# Altium PCB V3s.PcbDoc
Units mm, origin at the board's own origin, x right, y up, seen from the top; angles counter-clockwise.
Board outline 45.34 x 56.39 mm, 2 copper layers (Top Layer, Bottom Layer), stack 0.533 mm thick; 110 components, 51 nets, 431 pads, 303 vias.
Unrouted connection lines stored in the file: 396.
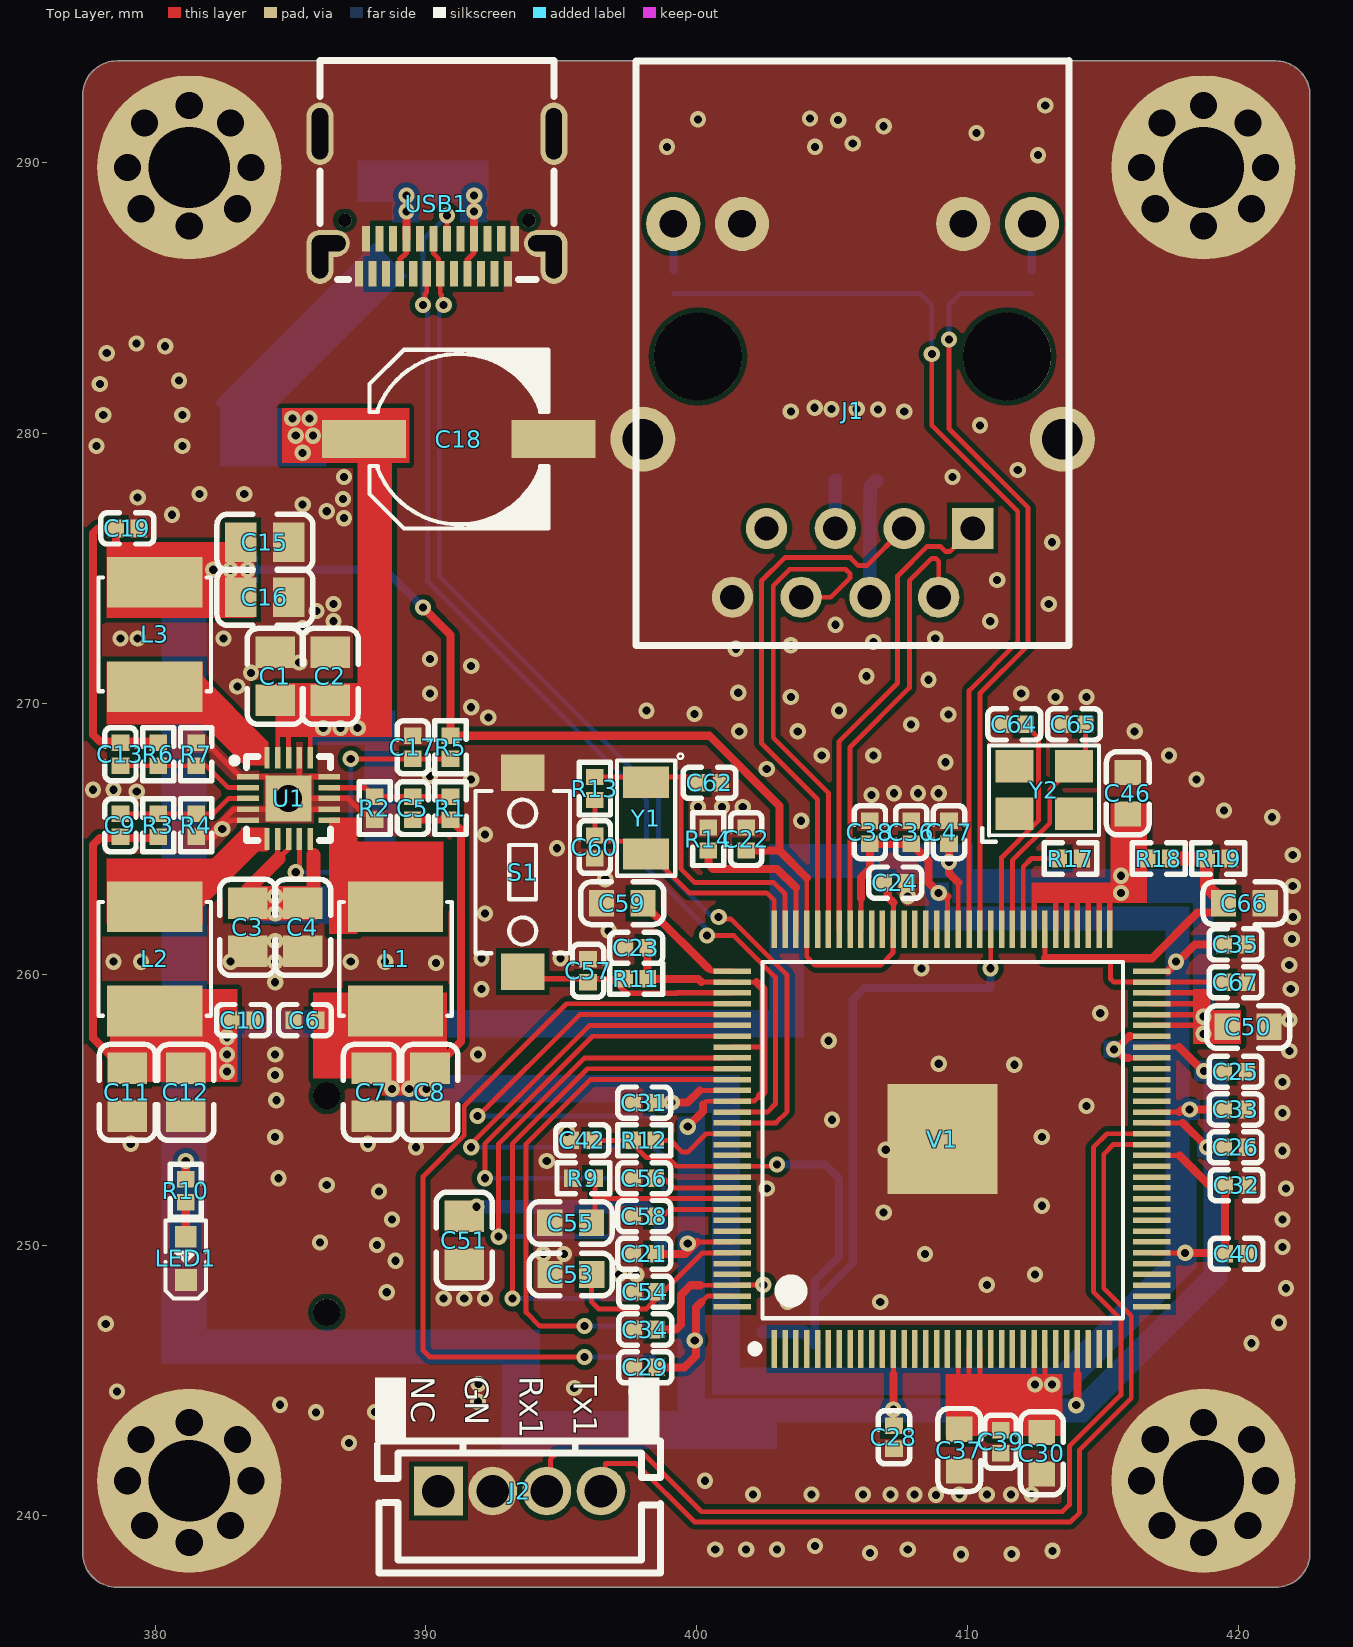
[diagram p0: Top Layer view]
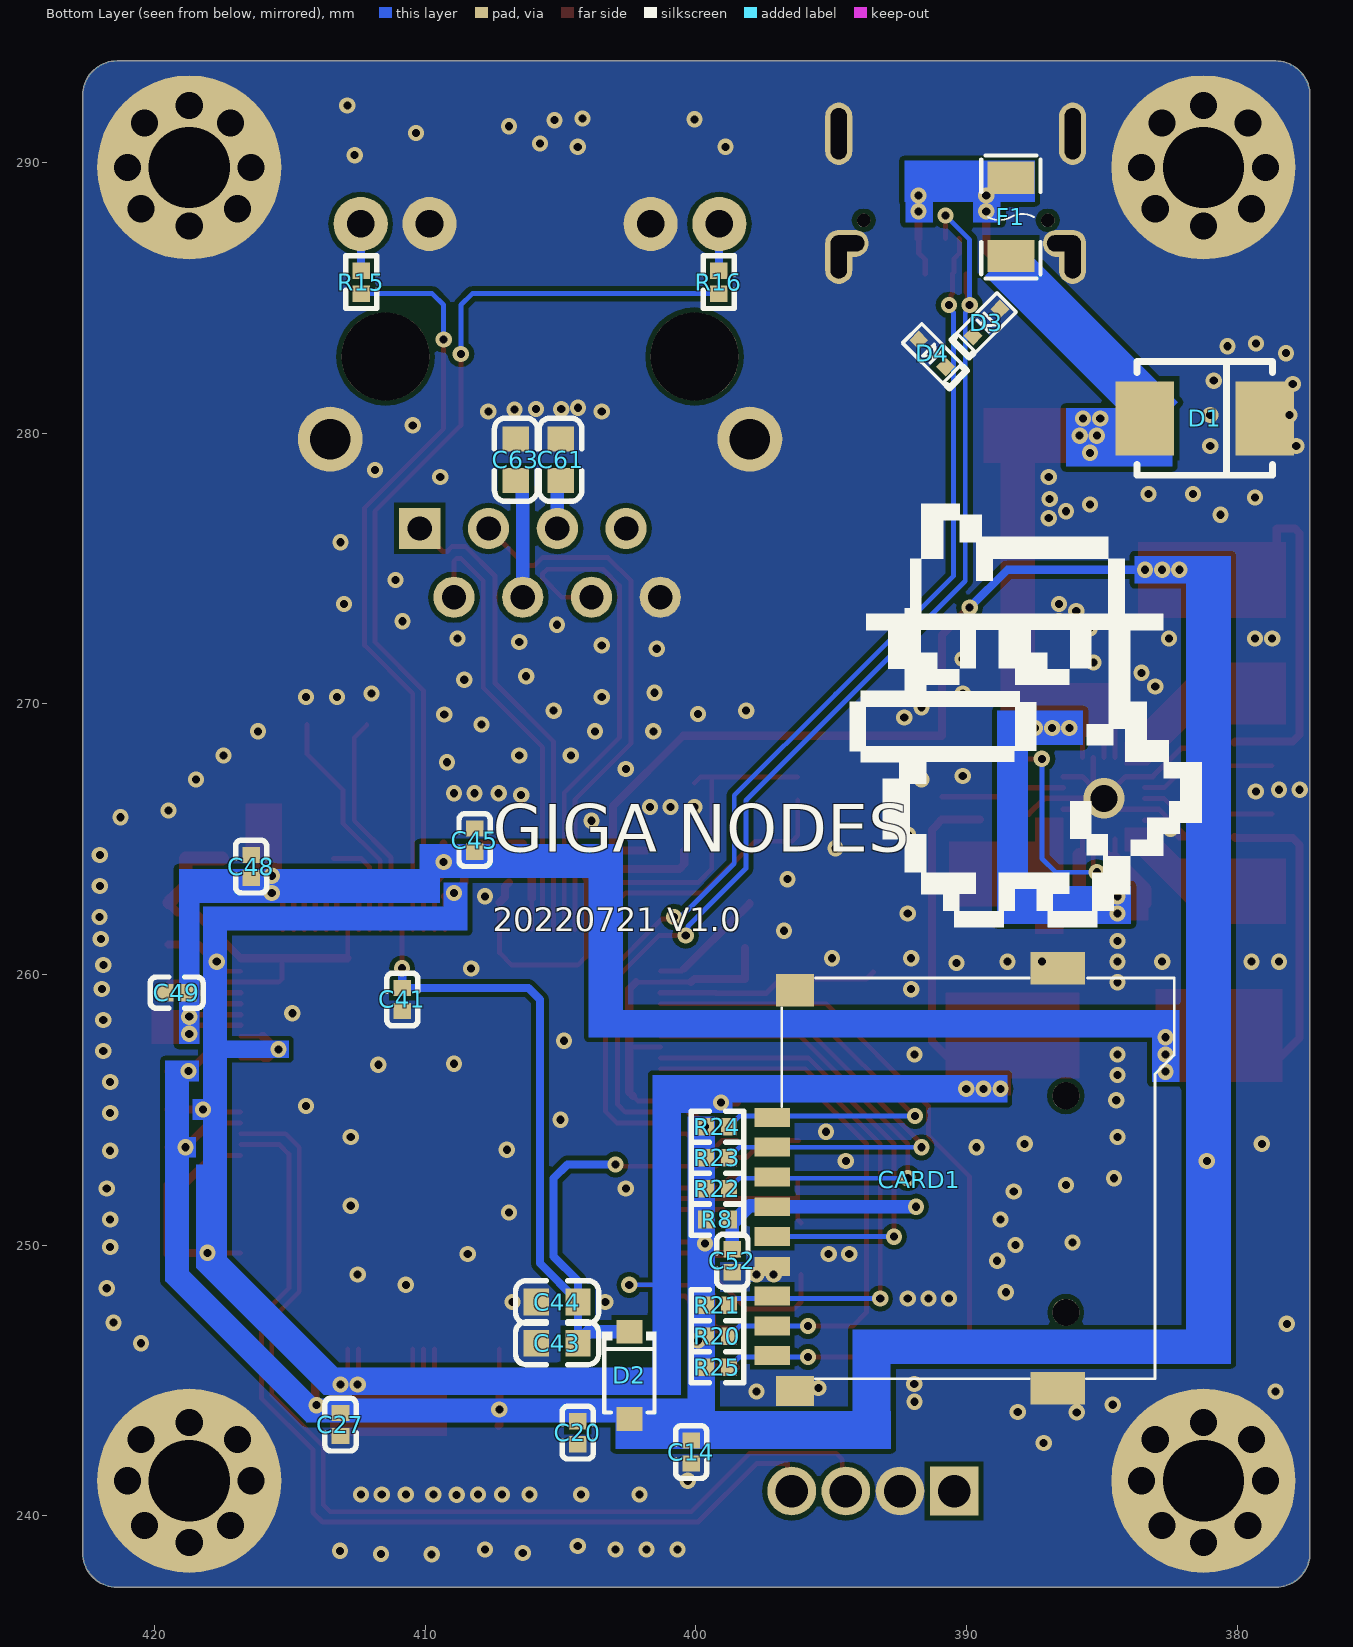
[diagram p1: Bottom Layer view, seen from below]
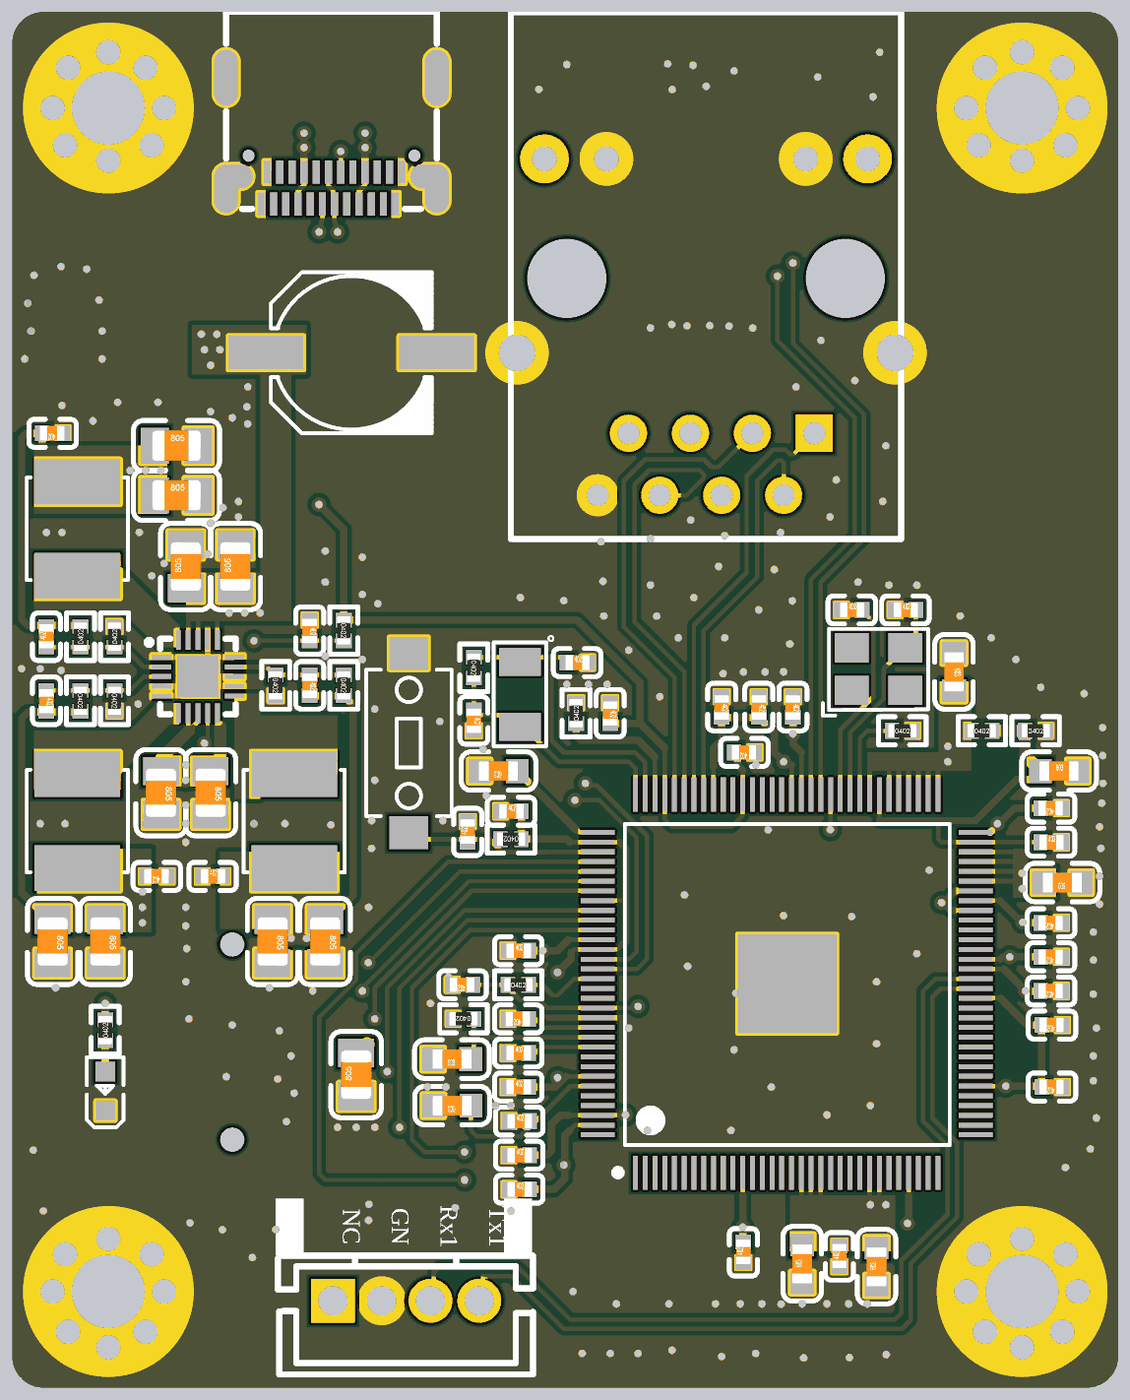
[diagram p2: 3D render of the assembled board from above, using the file's embedded part models]
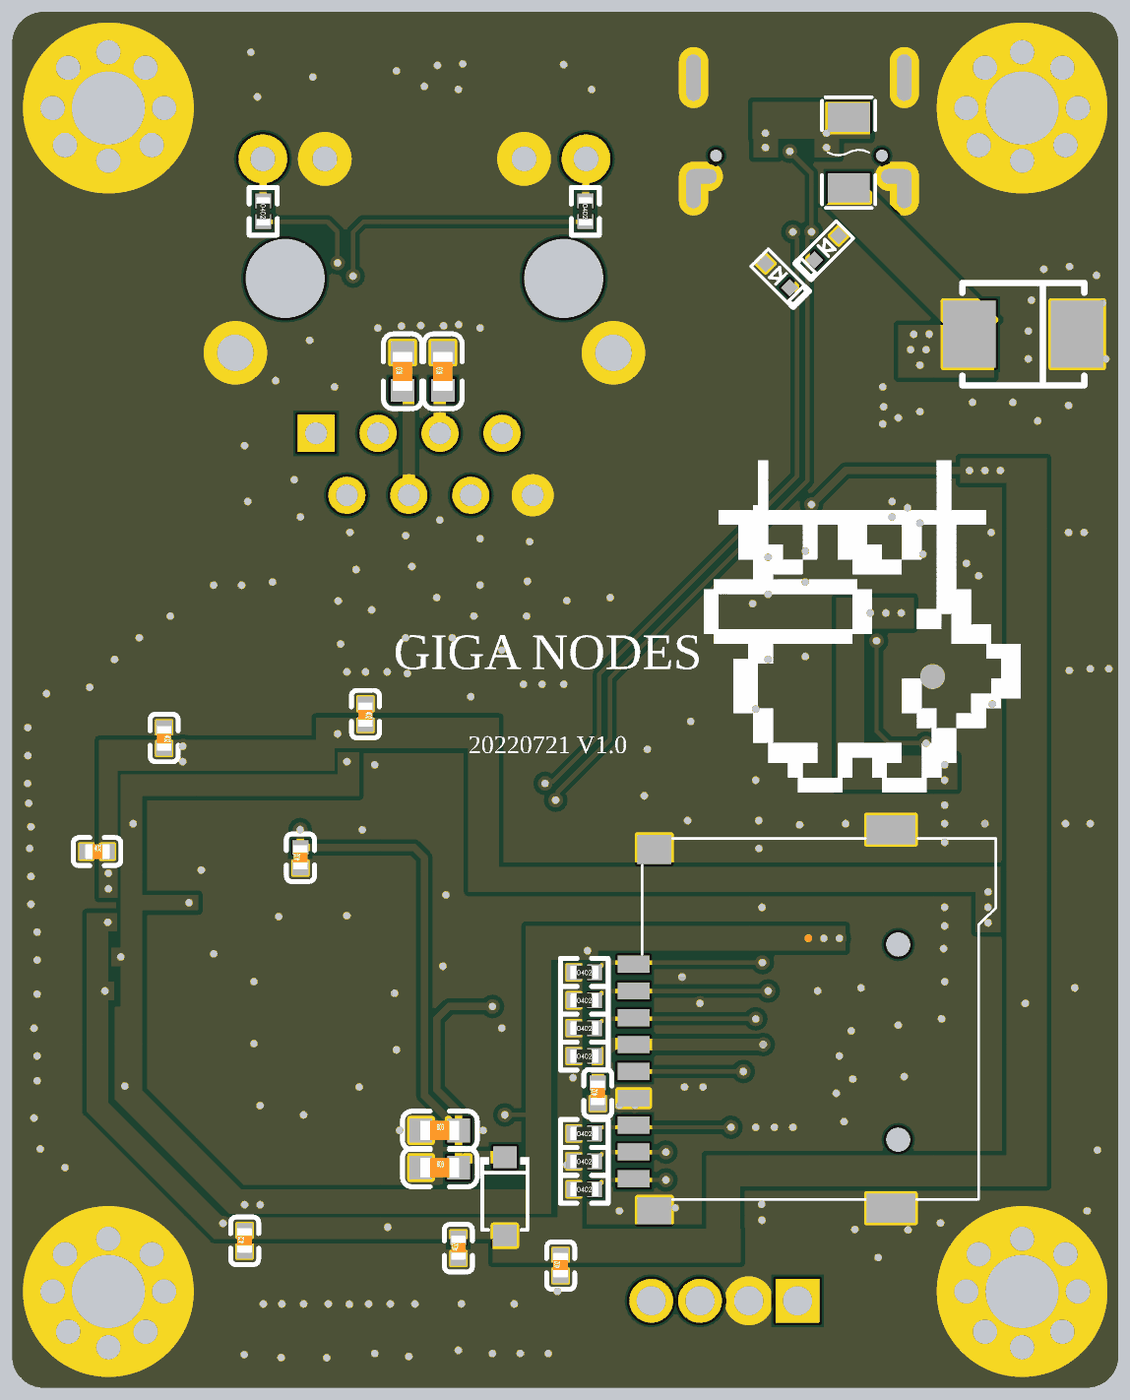
[diagram p3: 3D render of the assembled board from below, using the file's embedded part models]

## Layer stack, top to bottom
Top Solder: solder mask 0.0102, Solder Resist, Dk 3.5
Top Layer: signal copper 0.0356
Dielectric 2: prepreg 0.0711, PP-006, Dk 4.1
Dielectric 1: dielectric 0.32, FR-4, Dk 4.8
Dielectric 3: prepreg 0.0711, PP-006, Dk 4.1
Bottom Layer: signal copper 0.0356
Bottom Solder: solder mask 0.0102, Solder Resist, Dk 3.5

## Board outline
377.317,238.633 ccw(c378.587,238.633) 378.587,237.363 421.386,237.363 ccw(c421.386,238.633) 422.656,238.633 422.656,292.481 ccw(c421.386,292.481) 421.386,293.751 378.587,293.751 ccw(c378.587,292.481) 377.317,292.481

## Design rules (kind name [scope] priority, off if disabled: settings)
Clearance [All] p1: gap=0.1 ignorepadtopadclearanceinfootprint=TRUE
DiffPairsRouting [All] p1: maxlimit=0.254 minlimit=0.15 mostfreqgap=0.254 toplayer_minwidth=0.18 toplayer_maxwidth=0.381 toplayer_prefwidth=0.18 bottomlayer_minwidth=0.18 bottomlayer_maxwidth=0.381 bottomlayer_prefwidth=0.18 maxuncoupledlength=12.7
HoleSize [All] p1 off: absolutevalues=TRUE maxlimit=2.54 minlimit=0.025 maxpercent=80.000 minpercent=20.000
HoleToHoleClearance [All] p1 off: gap=0.254 allowstackedmicrovias=TRUE
LayerPairs [All] p1 off: enforce=TRUE
MinimumSolderMaskSliver [All] p1 off: minsoldermaskwidth=0.254
NetAntennae [All] p1 off: netantennaetolerance=0
PolygonConnect [All] p1: connectstyle=Direct reliefconductorwidth=0.5 reliefentries=4 polygonreliefangle="90 Angle" airgapwidth=0.5
RoutingVias [All] p1: holewidth=0.711 width=1.27 viastyle="Through Hole" minholewidth=0.3 minwidth=0.6 maxholewidth=3 maxwidth=3
SilkToSilkClearance [All] p1 off: silktosilkclearance=0.254
SilkToSolderMaskClearance [IsPad] p1 off: minsilkscreentomaskgap=0.254 clearancetoexposedcopper=TRUE
SolderMaskExpansion [All] p1: expansion=0.102 istentingtop=FALSE
Width [All] p1: maxlimit=2 minlimit=0.18 preferedwidth=0.254
22 further rules are at their usual default settings.

## Classes and differential pairs
component class V3s: C51 C52 C53 C54 C55 C56 C57 C58 C59 C60 C61 C62 C63 C64 C65 C66 C67 CARD1 D3 D4 J1 J2 R8 R9 R11 R12 R13 R14 R15 R16 R17 R18 R19 R20 R21 R22 R23 R24 R25 S1 USB1 V1 Y1 Y2
component class POWER: C1 C2 C3 C4 C5 C6 C7 C8 C9 C10 C11 C12 C13 C14 C15 C16 C17 C18 C19 C20 C21 C22 C23 C24 C25 C26 C27 C28 C29 C30 C31 C32 C33 C34 C35 C36 C37 C38 C39 C40 C41 C42 C43 C44 C45 C46 C47 C48 C49 C50 D1 D2 F1 L1 L2 L3 LED1 R1 R2 R3 R4 R5 R6 R7 R10 U1
differential pair USB-D: +USB-D_P -USB-D_N
differential pair PHY-TX: +PHY-TX_P -PHY-TX_N
differential pair PHY-RX: +PHY-RX_P -PHY-RX_N

## Components (designator, comment, footprint, x,y, rotation, side; value= is the part's Value field where it differs from the comment)
C1 "22uF" 0805_C 384.429,270.127 r90 top value="贴片电容/105 ±10% 50V X7R 编带 封装规格：0603"
C2 "22uF" 0805_C 386.461,270.127 r90 top value="贴片电容/105 ±10% 50V X7R 编带 封装规格：0603"
C3 "22uF" 0805_C 383.413,262.636 r270 top value="贴片电容/105 ±10% 50V X7R 编带 封装规格：0603"
C4 "22uF" 0805_C 385.445,262.636 r270 top value="贴片电容/105 ±10% 50V X7R 编带 封装规格：0603"
C5 "22pF" 0402_C 389.509,266.148 r270 top value="贴片电容/105 ±10% 50V X7R 编带 封装规格：0603"
C6 "0.1uF" 0402_C 385.528,258.318 r0 top value="贴片电容/105 ±10% 50V X7R 编带 封装规格：0603"
C7 "22uF" 0805_C 387.985,256.54 r270 top value="贴片电容/105 ±10% 50V X7R 编带 封装规格：0603"
C8 "22uF" 0805_C 390.144,256.54 r270 top value="贴片电容/105 ±10% 50V X7R 编带 封装规格：0603"
C9 "22pF" 0402_C 378.714,265.513 r270 top value="贴片电容/105 ±10% 50V X7R 编带 封装规格：0603"
C10 "0.1uF" 0402_C 383.242,258.318 r180 top value="贴片电容/105 ±10% 50V X7R 编带 封装规格：0603"
C11 "22uF" 0805_C 378.968,256.54 r270 top value="贴片电容/105 ±10% 50V X7R 编带 封装规格：0603"
C12 "22uF" 0805_C 381.127,256.54 r270 top value="贴片电容/105 ±10% 50V X7R 编带 封装规格：0603"
C13 "22pF" 0402_C 378.714,268.141 r90 top value="贴片电容/105 ±10% 50V X7R 编带 封装规格：0603"
C14 "0.1uF" 0402_C 400.177,242.36 r90 bottom value="贴片电容/105 ±10% 50V X7R 编带 封装规格：0603"
C15 "22uF" 0805_C 383.157,275.971 r0 top value="贴片电容/105 ±10% 50V X7R 编带 封装规格：0603"
C16 "22uF" 0805_C 383.157,273.939 r0 top value="贴片电容/105 ±10% 50V X7R 编带 封装规格：0603"
C17 "0.1uF" 0402_C 389.509,268.395 r270 top value="贴片电容/105 ±10% 50V X7R 编带 封装规格：0603"
C18 "470uF" SEC6.3 387.716,279.781 r0 top value="贴片电解电容/220uF 16V ±20% 编带  封装规格：6.3*7.7"
C19 "0.1uF" 0402_C 378.968,276.479 r180 top value="贴片电容/105 ±10% 50V X7R 编带 封装规格：0603"
C20 "0.1uF" 0402_C 404.368,243.078 r90 bottom value="贴片电容/105 ±10% 50V X7R 编带 封装规格：0603"
C21 "0.1uF" 0402_C 398.062,249.682 r0 top value="贴片电容/105 ±10% 50V X7R 编带 封装规格：0603"
C22 "0.1uF" 0402_C 401.828,265.005 r270 top value="贴片电容/105 ±10% 50V X7R 编带 封装规格：0603"
C23 "0.1uF" 0402_C 397.764,260.985 r0 top value="贴片电容/105 ±10% 50V X7R 编带 封装规格：0603"
C24 "0.1uF" 0402_C 407.333,263.398 r180 top value="贴片电容/105 ±10% 50V X7R 编带 封装规格：0603"
C25 "0.1uF" 0402_C 419.906,256.413 r180 top value="贴片电容/105 ±10% 50V X7R 编带 封装规格：0603"
C26 "0.1uF" 0402_C 419.906,253.619 r180 top value="贴片电容/105 ±10% 50V X7R 编带 封装规格：0603"
C27 "0.1uF" 0402_C 413.131,243.376 r90 bottom value="贴片电容/105 ±10% 50V X7R 编带 封装规格：0603"
C28 "0.1uF" 0402_C 407.289,242.907 r90 top value="贴片电容/105 ±10% 50V X7R 编带 封装规格：0603"
C29 "0.1uF" 0402_C 398.101,245.491 r0 top value="贴片电容/105 ±10% 50V X7R 编带 封装规格：0603"
C30 "10uF" 0603_C 412.75,242.316 r90 top value="贴片电容/105 ±10% 50V X7R 编带 封装规格：0603"
C31 "0.1uF" 0402_C 398.062,255.27 r0 top value="贴片电容/105 ±10% 50V X7R 编带 封装规格：0603"
C32 "0.1uF" 0402_C 419.945,252.222 r180 top value="贴片电容/105 ±10% 50V X7R 编带 封装规格：0603"
C33 "0.1uF" 0402_C 419.906,255.016 r180 top value="贴片电容/105 ±10% 50V X7R 编带 封装规格：0603"
C34 "0.1uF" 0402_C 398.101,246.888 r0 top value="贴片电容/105 ±10% 50V X7R 编带 封装规格：0603"
C35 "0.1uF" 0402_C 419.906,261.112 r180 top value="贴片电容/105 ±10% 50V X7R 编带 封装规格：0603"
C36 "0.1uF" 0402_C 407.924,265.259 r270 top value="贴片电容/105 ±10% 50V X7R 编带 封装规格：0603"
C37 "10uF" 0603_C 409.702,242.435 r90 top value="贴片电容/105 ±10% 50V X7R 编带 封装规格：0603"
C38 "0.1uF" 0402_C 406.4,265.259 r270 top value="贴片电容/105 ±10% 50V X7R 编带 封装规格：0603"
C39 "0.1uF" 0402_C 411.226,242.741 r90 top value="贴片电容/105 ±10% 50V X7R 编带 封装规格：0603"
C40 "0.1uF" 0402_C 419.945,249.682 r180 top value="贴片电容/105 ±10% 50V X7R 编带 封装规格：0603"
C41 "0.1uF" 0402_C 410.845,259.08 r90 bottom value="贴片电容/105 ±10% 50V X7R 编带 封装规格：0603"
C42 "0.1uF" 0402_C 395.776,253.873 r180 top
C43 "10uF" 0603_C 405.13,246.38 r180 bottom
C44 "10uF" 0603_C 405.13,247.904 r180 bottom
C45 "0.1uF" 0402_C 408.178,264.966 r270 bottom value="贴片电容/105 ±10% 50V X7R 编带 封装规格：0603"
C46 "10uF" 0603_C 415.925,266.7 r270 top value="贴片电容/105 ±10% 50V X7R 编带 封装规格：0603"
C47 "0.1uF" 0402_C 409.321,265.259 r270 top value="贴片电容/105 ±10% 50V X7R 编带 封装规格：0603"
C48 "0.1uF" 0402_C 416.433,263.989 r270 bottom value="贴片电容/105 ±10% 50V X7R 编带 封装规格：0603"
C49 "0.1uF" 0402_C 419.183,259.334 r180 bottom value="贴片电容/105 ±10% 50V X7R 编带 封装规格：0603"
C50 "10uF" 0603_C 420.37,258.064 r180 top value="贴片电容/105 ±10% 50V X7R 编带 封装规格：0603"
C51 "22uF" 0805_C 391.414,249.299 r90 top value="贴片电容/105 ±10% 50V X7R 编带 封装规格：0603"
C52 "0.1uF" 0402_C 398.653,249.428 r90 bottom value="贴片电容/105 ±10% 50V X7R 编带 封装规格：0603"
C53 "10uF" 0603_C 395.351,248.92 r180 top
C54 "0.1uF" 0402_C 398.101,248.285 r0 top
C55 "10uF" 0603_C 395.343,250.825 r180 top
C56 "105" 0402_C 398.062,252.476 r180 top value="贴片电容/105 ±10% 50V X7R 编带 封装规格：0603"
C57 "0.1uF" 0402_C 395.986,260.14 r90 top
C58 "0.1uF" 0402_C 398.062,251.079 r0 top
C59 "10uF" 0603_C 397.248,262.636 r180 top
C60 "18pF" 0402_C 396.24,264.712 r270 top
C61 "0.1uF" 0603_C 405.003,279.019 r90 bottom
C62 "18pF" 0402_C 400.475,267.081 r0 top
C63 "0.1uF" 0603_C 406.654,279.019 r90 bottom
C64 "18pF" 0402_C 411.734,269.24 r0 top
C65 "18pF" 0402_C 413.937,269.24 r0 top
C66 "10uF" 0603_C 420.235,262.636 r0 top
C67 "0.1uF" 0402_C 419.906,259.715 r0 top
CARD1 "THD2528-11SD-GF" TF-CARD-14.5X14.75X1.85MM 397.184,254.723 r90 bottom
D1 "SMBJ6.0CA" SMB(DO-214AA) 381.203,280.543 r0 bottom
D2 "1N5819W" SOD-123 402.463,246.806 r270 bottom
D3 "BSD5C051L" SOD-523 388.773,284.581 r135 bottom
D4 "BSD5C051L" SOD-523 391.769,283.438 r45 bottom
F1 "100mA 10V" 1206_F 388.366,286.543 r90 bottom
J1 "HR911105A_C12074" HR913550A 410.2,276.479 r180 top
J2 "4P-2.0MM 插件 立式" Hole,4P=2.00MM 390.462,240.919 r0 top value=2.54-4P-WDIP
L1 "2.2uH/4x4" SMD,4x4x2mm 388.874,258.653 r270 top
L2 "2.2uH/4x4" SMD,4x4x2mm 379.984,258.653 r270 top
L3 "2.2uH/4x4" SMD,4x4x2mm 379.984,274.493 r90 top
LED1 "MHT192JGCT" LED0603 381.134,248.718 r90 top
R1 "100K 1%" 0402_R 390.906,266.148 r270 top value="贴片电阻/10KΩ ±5% 编带 封装规格：0603"
R2 "100K 1%" 0402_R 388.112,266.148 r270 top value="贴片电阻/10KΩ ±5% 编带 封装规格：0603"
R3 "100K 1%" 0402_R 380.111,265.513 r270 top value="贴片电阻/10KΩ ±5% 编带 封装规格：0603"
R4 "50K 1%" 0402_R 381.508,265.513 r270 top value="贴片电阻/10KΩ ±5% 编带 封装规格：0603"
R5 "4.7K" 0402_R 390.906,268.395 r270 top value="贴片电阻/10KΩ ±5% 编带 封装规格：0603"
R6 "100K 1%" 0402_R 380.111,268.141 r90 top value="贴片电阻/10KΩ ±5% 编带 封装规格：0603"
R7 "22.1K 1%" 0402_R 381.508,268.141 r90 top value="贴片电阻/10KΩ ±5% 编带 封装规格：0603"
R8 "1R" 0402_R 399.205,250.952 r180 bottom value="贴片电阻/10KΩ ±5% 编带 封装规格：0603"
R9 "200K" 0402_R 395.815,252.476 r180 top value="贴片电阻/10KΩ ±5% 编带 封装规格：0603"
R10 "1K" 0402_R 381.127,252.012 r90 top value="贴片电阻/10KΩ ±5% 编带 封装规格：0603"
R11 "47K" 0402_R 397.764,259.842 r180 top value="贴片电阻/10KΩ ±5% 编带 封装规格：0603"
R12 "47K" 0402_R 398.062,253.873 r0 top value="贴片电阻/10KΩ ±5% 编带 封装规格：0603"
R13 "10M" 0402_R 396.24,266.871 r270 top value="贴片电阻/10KΩ ±5% 编带 封装规格：0603"
R14 "6.08K%1" 0402_R 400.431,265.005 r90 top value="贴片电阻/10KΩ ±5% 编带 封装规格：0603"
R15 "510" 0402_R 412.369,285.579 r270 bottom value="贴片电阻/10KΩ ±5% 编带 封装规格：0603"
R16 "510" 0402_R 399.161,285.579 r270 bottom value="贴片电阻/10KΩ ±5% 编带 封装规格：0603"
R17 "240R%1" 0402_R 413.81,264.287 r0 top value="贴片电阻/10KΩ ±5% 编带 封装规格：0603"
R18 "2K%1" 0402_R 417.068,264.287 r0 top value="贴片电阻/10KΩ ±5% 编带 封装规格：0603"
R19 "2K%1" 0402_R 419.271,264.287 r0 top value="贴片电阻/10KΩ ±5% 编带 封装规格：0603"
R20 "47K" 0402_R 399.205,246.634 r180 bottom value="贴片电阻/10KΩ ±5% 编带 封装规格：0603"
R21 "47K" 0402_R 399.205,247.777 r180 bottom value="贴片电阻/10KΩ ±5% 编带 封装规格：0603"
R22 "47K" 0402_R 399.205,252.095 r180 bottom value="贴片电阻/10KΩ ±5% 编带 封装规格：0603"
R23 "47K" 0402_R 399.205,253.238 r180 bottom value="贴片电阻/10KΩ ±5% 编带 封装规格：0603"
R24 "47K" 0402_R 399.205,254.381 r180 bottom value="贴片电阻/10KΩ ±5% 编带 封装规格：0603"
R25 "47K" 0402_R 399.205,245.491 r180 bottom value="贴片电阻/10KΩ ±5% 编带 封装规格：0603"
S1 "SW-PB_1" KEY-3X6-SMD 393.573,267.462 r90 top
U1 "EA3036/RY1303A" QFN3x3-20 383.426,267.308 r270 top
USB1 "TYPE-C 24P QT" USB-C-SMD_TYPE-C-24P-QT 393.029,285.886 r180 top
V1 "V3S" QUAD128 402.864,246.171 r0 top
Y1 "32.768KHz" SMD3215-2P 398.13,267.105 r270 top
Y2 "24MHz" SMD3225-4P 411.734,265.938 r0 top value=12MHz

## Footprints (in the part's own frame and the unit in brackets; to place one, negate y for a bottom-side part, rotate by r counter-clockwise, add the part's x,y. Pads: shape width x height; smd on the part's side, far side on the other; paste and mask are expansions set on the pad)
0402_C [mm]
  rect 0.6x0.65 smd mask+0.051: 1(-0.425,0) 2(0.425,0)
  silkscreen extent -0.97,-0.58 0.98,0.58, body extent -0.48,-0.3 0.52,0.3, height 0.2
0402_R [mm]
  rect 0.6x0.65 smd mask+0.051: 1(-0.425,0) 2(0.425,0)
  silkscreen extent -0.98,-0.58 0.98,0.57, body extent -0.57,-0.27 0.58,0.28, height 0.41
0603_C [mm]
  rect 0.93x0.98 smd: 1(-0.77,0) 2(0.77,0)
  silkscreen extent -1.53,-0.79 1.54,0.79, body extent -0.8,-0.4 0.8,0.4, height 0.3
0805_C [mm]
  rect 1.16x1.47 smd: 1(0,0) 2(1.78,0)
  silkscreen extent -0.88,-1.04 2.66,1.04, body extent -0.11,-0.62 1.89,0.63, height 0.77
1206_F [mm]
  rect 1.19x1.728 smd: 1(0,0) 2(2.89,0)
  silkscreen extent -0.82,-1.09 3.71,1.09
Hole,4P=2.00MM [mm]
  rect 1.8x1.8 hole 1.2: 1(0,0)
  round 1.8 hole 1.2: 2(2,0) 3(4,0) 4(6,0)
  silkscreen extent -2.26,-3.02 8.21,1.85
HR913550A [mm]
  rect 1.524x1.524 hole 0.9: 1(0,0)
  round 1.524 hole 0.9: 2(1.26,2.54) 3(2.54,0) 4(3.8,2.54) 5(5.08,0) 6(6.34,2.54) 7(7.62,0) 8(8.88,2.54)
  round 2 hole 1.02: 9(-2.185,-11.25) 10(0.355,-11.25) 11(8.525,-11.25) 12(11.065,-11.25)
  round 2.4 hole 1.5: 13(-3.31,-3.3) 14(12.19,-3.3)
  round 3.25 hole 3.25 unplated: ""(-1.27,-6.35) ""(10.15,-6.35)
  silkscreen extent -3.56,-17.28 12.44,4.33
KEY-3X6-SMD [mm]
  rect 1.35x1.6 smd: 1(0,0) 2(-7.35,0)
  silkscreen extent -6.67,-1.75 -0.67,1.75
LED0603 [mm]
  rect 0.8x0.8 smd: 1(0,0) 2(1.599,0.007)
  silkscreen extent -0.69,-0.74 2.19,0.76
QFN3x3-20 [mm]
  rect 0.2x0.8 smd: 1(0,0) 2(0.4,0) 3(0.8,0) 4(1.2,0) 5(1.6,0) 11(1.6,3) 12(1.2,3) 13(0.8,3) 14(0.4,3) 15(0,3)
  rect 0.8x0.2 smd: 6(2.3,0.7) 7(2.3,1.1) 8(2.3,1.5) 9(2.3,1.9) 10(2.3,2.3) 16(-0.7,2.3) 17(-0.7,1.9) 18(-0.7,1.5) 19(-0.7,1.1) 20(-0.7,0.7)
  rect 1.7x1.7 smd: 21(0.8,1.5)
  silkscreen extent -0.75,-0.6 2.35,3.05
QUAD128 [mil]
  rect 8x55 smd: 1(0,0) 2(15.75,0) 3(31.5,0) 4(47.24,0) 5(62.99,0) 6(78.74,0) 7(94.49,0) 8(110.24,0) 9(125.98,0) 10(141.73,0) 11(157.48,0) 12(173.23,0) 13(188.98,0) 14(204.72,0) 15(220.47,0) 16(236.22,0) 17(251.97,0) 18(267.72,0) 19(283.46,0) 20(299.21,0) 21(314.96,0) 22(330.71,0) 23(346.46,0) 24(362.2,0) 25(377.95,0) 26(393.7,0) 27(409.45,0) 28(425.2,0) 29(440.94,0) 30(456.69,0) 31(472.44,0) 32(488.19,0) 65(488.19,610.24) 66(472.44,610.24) 67(456.69,610.24) 68(440.94,610.24) 69(425.2,610.24) 70(409.45,610.24) 71(393.7,610.24) 72(377.95,610.24) 73(362.2,610.24) 74(346.46,610.24) 75(330.71,610.24) 76(314.96,610.24) 77(299.21,610.24) 78(283.46,610.24) 79(267.72,610.24) 80(251.97,610.24) 81(236.22,610.24) 82(220.47,610.24) 83(204.72,610.24) 84(188.98,610.24) 85(173.23,610.24) 86(157.48,610.24) 87(141.73,610.24) 88(125.98,610.24) 89(110.24,610.24) 90(94.49,610.24) 91(78.74,610.24) 92(62.99,610.24) 93(47.24,610.24) 94(31.5,610.24) 95(15.75,610.24) 96(0,610.24)
  rect 55x8 smd: 33(549.21,61.02) 34(549.21,76.77) 35(549.21,92.52) 36(549.21,108.27) 37(549.21,124.02) 38(549.21,139.76) 39(549.21,155.51) 40(549.21,171.26) 41(549.21,187.01) 42(549.21,202.76) 43(549.21,218.5) 44(549.21,234.25) 45(549.21,250) 46(549.21,265.75) 47(549.21,281.5) 48(549.21,297.24) 49(549.21,312.99) 50(549.21,328.74) 51(549.21,344.49) 52(549.21,360.24) 53(549.21,375.98) 54(549.21,391.73) 55(549.21,407.48) 56(549.21,423.23) 57(549.21,438.98) 58(549.21,454.72) 59(549.21,470.47) 60(549.21,486.22) 61(549.21,501.97) 62(549.21,517.72) 63(549.21,533.46) 64(549.21,549.21) 97(-61.02,549.21) 98(-61.02,533.46) 99(-61.02,517.72) 100(-61.02,501.97) 101(-61.02,486.22) 102(-61.02,470.47) 103(-61.02,454.72) 104(-61.02,438.98) 105(-61.02,423.23) 106(-61.02,407.48) 107(-61.02,391.73) 108(-61.02,375.98) 109(-61.02,360.24) 110(-61.02,344.49) 111(-61.02,328.74) 112(-61.02,312.99) 113(-61.02,297.24) 114(-61.02,281.5) 115(-61.02,265.75) 116(-61.02,250) 117(-61.02,234.25) 118(-61.02,218.5) 119(-61.02,202.76) 120(-61.02,187.01) 121(-61.02,171.26) 122(-61.02,155.51) 123(-61.02,139.76) 124(-61.02,124.02) 125(-61.02,108.27) 126(-61.02,92.52) 127(-61.02,76.77) 128(-61.02,61.02)
  rect 160x160 smd: 129(245,305)
  silkscreen extent -32,-3 507,563
SEC6.3 [mm]
  rect 3.1x1.4 smd: 1(0,0) 2(7,0)
  silkscreen extent 0.2,-3.3 6.8,3.3
SMB(DO-214AA) [mm]
  rect 2.159x2.743 smd: 1(2.21,0) 2(-2.21,0)
  silkscreen extent -2.5,-2.1 2.5,2.1
SMD3215-2P [mm]
  rect 1.15x1.7 smd: 1(0,0) 2(2.65,0)
  silkscreen extent -1.06,-1.08 3.45,1.37
SMD3225-4P [mm]
  rect 1.4x1.2 smd: 1(0,0) 2(2.2,0) 3(2.2,1.75) 4(0,1.75)
  silkscreen extent -1.19,-1.03 3.13,2.53
SMD,4x4x2mm [mm]
  rect 1.874x3.52 smd: 1(0,0) 2(-3.856,0)
  silkscreen extent -4.03,-2.08 0.17,2.08
SOD-123 [mm]
  rect 0.88x0.96 smd: 1(0,0) 2(3.22,0)
  silkscreen extent 0.01,-1 2.99,1
SOD-523 [mm]
  rrect0% 0.5x0.5 smd: 1(0,0) 2(-1.4,0)
  silkscreen extent -2.05,-0.5 0.35,0.5
TF-CARD-14.5X14.75X1.85MM [mm]
  rect 0.7x1.3 smd: 1(0,0) 2(-1.1,0) 3(-2.2,0) 4(-3.3,0) 5(-4.4,0) 6(-5.5,0) 7(-6.6,0) 8(-7.7,0) 9(-8.8,0)
  rect 1.1x1.4 smd: 10(-10.11,-0.85)
  rect 1.2x2 smd: 11(-10.01,-10.55) 12(5.51,-10.55)
  rect 1.2x1.4 smd: 13(4.7,-0.85)
  round 1 hole 1 unplated: 14(-7.2,-10.85) 15(0.8,-10.85)
  silkscreen extent -9.65,-14.85 5.15,-0.35
USB-C-SMD_TYPE-C-24P-QT [mm]
  oval 1x2 hole 0.6 slot 1.6 at 90 deg: 1(-1.695,-0.625) 2(6.945,-0.625)
  oval 1.5x1 hole 0.6 slot 1.2 at 0 deg: 1(-1.345,-1.125) 2(6.595,-1.125)
  oval 1x2.3 hole 0.6 slot 1.9 at 90 deg: 3(6.945,-5.175) 4(-1.695,-5.175)
  rect 0.3x0.95 smd: A1(0,0) A2(0.5,0) A3(1,0) A4(1.5,0) A5(2,0) A6(2.5,0) A7(3,0) A8(3.5,0) A9(4,0) A10(4.5,0) A11(5,0) A12(5.5,0) B1(5.25,-1.3) B2(4.75,-1.3) B3(4.25,-1.3) B4(3.75,-1.3) B5(3.25,-1.3) B6(2.75,-1.3) B7(2.25,-1.3) B8(1.75,-1.3) B9(1.25,-1.3) B10(0.75,-1.3) B11(0.25,-1.3) B12(-0.25,-1.3)
  round 0.5 hole 0.5 unplated: ""(-0.775,-1.974) ""(6.025,-1.974)
  silkscreen extent -1.7,-7.87 6.94,0.21

## Part data
C1 C2 C3 C4 C5 C6 C7 C8 C9 C10 C11 C12 C13 C14 C15 C16 C17 C19 C20 C21 C22 C23 C24 C25 C26 C27 C28 C29 C30 C31 C32 C33 C34 C35 C36 C37 C38 C39 C40 C41 C45 C46 C47 C48 C49 C50 C51 C52 C56: library part CAP, "贴片电容"
C18: library part "CAPACITOR POL", "贴片电解电容"
C42 C43 C44 C53 C54 C55 C57 C58 C59 C61 C63 C64 C65 C66 C67: library part 036960, "贴片电容", 产品型名=CC0603KRX7R9BB104(C0603-104K/50V), 品名=电容器, 品牌=YAGEO, 存货编码=036960, 封装=0603
C60 C62: library part CAP-SMD, "贴片电容"
CARD1: BOM_JLCPCB Part Class="Extended Part", BOM_Manufacturer=THD, BOM_Manufacturer Part=THD2528-11SD-GF, BOM_Supplier=LCSC, BOM_Supplier Part=C283232, Contributor=LCSC, spicePre=C, spiceSymbolName=THD2528-11SD-GF
D1: library part SMBJ6.0CA_C211762, BOM_JLCPCB Part Class="Extended Part", BOM_Manufacturer="Yangzhou Yangjie Elec Tech", BOM_Manufacturer Part=SMBJ6.0CA, BOM_Supplier=LCSC, BOM_Supplier Part=C211762, Contributor=LCSC, spicePre=D, spiceSymbolName=SMBJ6.0CA_C211762
D2: library part 1N5819W_C727115, "C727115", BOM_JLCPCB Part Class="Extended Part", BOM_Manufacturer=TWGMC, BOM_Manufacturer Part=1N5819W, BOM_Supplier=LCSC, BOM_Supplier Part=C727115, Contributor=LCSC, spicePre=D, spiceSymbolName=1N5819W_C727115
D3 D4: library part DIODE_ESD, PCB DECAL=0402
F1: library part nSMD025, "贴片自恢复保险丝"
J1: BOM_JLCPCB Part Class="Extended Part", BOM_Manufacturer=HANRUN, BOM_Manufacturer Part=HR911105A, BOM_Supplier=LCSC, BOM_Supplier Part=C12074, spicePre=J, spiceSymbolName=HR911105A_C12074
J2: library part CON-4P, "插件-立式插座", PCB DECAL=2.5-4P, Source_Path=E:\JIANG\二代产品开发资料\设计参考\A20CORNEL\LIBRARY1.OLB
L1 L2 L3: library part ind1, "贴片功率电感", DC Resistor=0.04ohm, Resonace frequency=38M, Tolerance=20%, Created by=YTL, Irms=2.4A, Isat=3.3A, Priority=A
LED1: "LED贴片0603高亮黄绿色光,C473820", BOM_JLCPCB Part Class="Extended Part", BOM_Manufacturer=MEIHUA, BOM_Manufacturer Part=MHT192JGCT, BOM_Supplier=LCSC, BOM_Supplier Part=C473820, Contributor=LCSC, spicePre=L, spiceSymbolName=MHT192JGCT
R1 R2 R3 R4 R5 R6 R7 R8 R9 R10 R11 R12 R13 R14 R15 R16 R17 R18 R19 R20 R21 R22 R23 R24 R25: library part Res2, "贴片电阻"
U1: library part EA3036
USB1: "C2681555 品牌： SHOU HAN(首韩)", BOM_JLCPCB Part Class="Extended Part", BOM_Manufacturer="SHOU HAN(首韩)", BOM_Manufacturer Part="TYPE-C 24P QT", BOM_Supplier=LCSC, BOM_Supplier Part=C2681555, Contributor=LCSC, spicePre=U, spiceSymbolName="TYPE-C 24P QT"
V1: Package Display=No, Contributor=cnicfhnui, spicePre=U
Y1: library part CRYSTAL-C, "时钟晶体 32.768kHz 12.5PF 20PPM"
Y2: library part CRYSTAL4P_2, "贴片无源晶振", PCB=3225, PCB DECAL=SX4-3225-1, SPE=±20ppm-12pF/-40℃～+85℃---3225

## Free pads (board coordinates)
  round 6.8 hole 3: 9(381.254,241.3) 9(381.254,289.814) 9(418.719,241.3) 9(418.719,289.814)

## Via types
v1: diameter 0.6, hole 0.3, Top Layer to Bottom Layer, tented both sides, 270 vias
v2: diameter 1.8, hole 1, Top Layer to Bottom Layer, tented both sides, 32 vias
v3: diameter 1.5, hole 1, Top Layer to Bottom Layer, tented both sides, 1 vias

## Nets (pads, with @x,y where several pads share a name; then routed paths per layer and width w, separated by ;. In a path a pad name is that pad's centre, name@x,y a point inside that pad or via, vN(x,y) a via of type N, cw(c..) or ccw(c..) an arc to the next point about the centre after c; other vN are vias at no path point)
AVCC: C41.2 C42.1 C43.2 C44.2 D2.1 R12.1 V1.76 V1.115 | length 37.5
  Top Layer w0.18: C42.1 397.51,253.873 398.145,253.238 398.939,253.238 399.256,252.921 V1.115 v1@403.161,252.921 ; v1(410.855,260.233) 410.864,260.242 V1.76
  Bottom Layer w0.3: v1(402.971,252.984) 404.749,252.984 405.257,252.476 405.257,249.588 404.36,248.691 C44.2@404.36,247.929 ; C43.2@404.36,246.405 C44.2 C44.2@404.36,247.929 ; v1(410.855,260.233) 410.85,260.228 410.85,259.51 C41.2 406.19,259.505 405.765,259.08 405.765,249.334 C44.2@404.36,247.929
  Bottom Layer w0.5: D2.1 403.959,246.806 C43.2@404.36,246.405
GND: C1.2 C2.2 C3.2 C4.2 C6.1 C7.2 C8.2 C10.1 C11.2 C12.2 C14.1 C15.2 C16.2 C17.1 C18.2 C19.1 C20.1 C21.1 C22.1 C23.1 C24.1 C25.1 C26.1 C27.1 C28.1 C29.1 C30.1 C31.1 C32.1 C33.1 C34.1 C35.1 C36.1 C37.1 C38.1 C39.1 C40.1 C41.1 C42.2 C43.1 C44.1 C45.1 C46.1 C47.1 C48.1 C49.1 C50.1 C51.1 C52.1 C53.2 C54.1 C55.2 C56.2 C57.2 C58.1 C59.2 C60.2 C61.2 C62.2 C63.2 C64.1 C65.1 C66.2 C67.2 CARD1.6 CARD1.10 CARD1.11 CARD1.12 CARD1.13 D1.2 D3.1 D4.1 J1.8 J1.10 J1.11 J1.13 J1.14 J2.2 LED1.1 pad.9 R2.2 R4.2 R7.2 R9.2 R14.2 R17.2 R19.2 S1.1 U1.1 U1.4 U1.5 U1.12 U1.13 U1.15 U1.17 U1.21 USB1.1 USB1.2 USB1.3 USB1.4 USB1.A1 USB1.A12 USB1.B1 USB1.B12 V1.116 V1.129 | length 17.9
  Top Layer w0.2: R7.2 381.708,268.366 382.068,268.366 383.126,267.308 U1.1 384.126,267.308 v3(384.926,266.508) ; U1.5 382.802,265.708 382.143,265.049 381.845,265.049 382.904,266.108 U1.4 384.526,266.108 v3(384.926,266.508) ; U1.17 U1.21@385.326,266.908 ; U1.12 385.326,266.108 v3(384.926,266.508) ; U1.15 385.726,267.308 U1.21@385.326,266.908 ; R2.2 387.912,265.923 387.711,265.923 387.126,266.508 U1.13 385.133,266.508 U1.21@385.03,266.612 ; v3(384.926,266.508) U1.21@385.03,266.612 ; U1.21@385.03,266.612 U1.21@385.326,266.908
  other v1: 409.764,238.582 411.636,238.591 406.4,238.633 413.147,238.711 400.685,238.76 401.828,238.76 402.971,238.76 407.797,238.76 404.368,238.887 402.082,240.792 404.241,240.792 406.146,240.792 407.162,240.792 408.051,240.792 408.84,240.78 409.702,240.792 410.718,240.792 411.607,240.792 412.369,240.792 400.304,241.3 387.155,242.693 385.933,243.828 388.112,243.84 384.604,244.11 391.922,244.221 378.587,244.602 397.764,244.602 395.478,244.729 391.936,244.873 420.497,246.38 378.171,247.098 421.513,247.142 403.352,247.904 406.781,247.904 390.652,248.031 391.414,248.031 392.176,248.031 388.552,248.262 421.767,248.412 410.718,248.539 397.129,248.92 397.764,248.92 412.496,248.92 388.874,249.428 394.335,249.682 395.097,249.682 408.432,249.682 421.64,249.936 388.193,250.009 386.088,250.106 388.747,250.952 421.64,250.952 406.908,251.206 412.75,251.46 388.261,251.988 402.59,252.095 421.767,252.095 386.334,252.222 384.556,252.476 394.462,253.111 421.64,253.492 406.985,253.528 389.636,253.619 379.095,253.746 387.858,253.746 384.429,254 412.75,254 395.199,254.193 405.003,254.635 421.64,254.889 414.401,255.143 384.472,255.358 421.64,256.032 384.429,256.286 411.734,256.667 408.941,256.707 384.429,257.048 391.922,257.048 421.894,257.175 404.876,257.556 421.894,258.318 414.909,258.572 392.049,259.461 421.948,259.465 384.429,259.715 408.305,260.223 421.891,260.349 390.375,260.428 378.46,260.477 379.476,260.477 382.778,260.477 384.429,260.477 387.223,260.477 388.493,260.477 392.049,260.604 394.97,260.604 384.429,261.239 421.985,261.317 396.748,261.62 422.032,262.126 392.176,262.255 407.797,262.89 422.021,263.271 396.621,263.525 422.021,264.414 394.843,264.668 392.176,265.176 382.472,265.378 403.86,265.684 421.259,265.811 419.481,266.065 400.05,266.192 400.939,266.192 401.701,266.192 406.458,266.629 407.289,266.7 408.178,266.7 408.94,266.7 379.317,266.758 377.698,266.827 378.46,266.827 391.668,267.208 418.465,267.208 390.144,267.335 402.59,267.589 409.194,267.843 404.622,268.097 406.527,268.097 417.449,268.097 401.574,268.986 403.733,268.986 416.179,268.986 407.924,269.24 392.303,269.494 409.298,269.608 399.923,269.621 398.145,269.748 405.257,269.748 391.668,269.875 403.479,270.256 413.258,270.256 414.401,270.256 390.144,270.383 411.988,270.383 401.535,270.412 383.032,270.637 408.559,270.891 406.273,271.018 383.54,271.145 391.668,271.399 385.318,271.526 390.144,271.653 401.447,272.034 403.479,272.161 406.527,272.288 378.714,272.415 379.349,272.415 382.524,272.415 408.813,272.415 385.445,272.796 405.13,272.923 386.588,273.05 410.845,273.05 385.953,273.431 386.588,273.685 413.004,273.685 411.099,274.574 413.131,275.971 386.969,276.86 380.619,276.987 386.334,277.114 385.445,277.368 386.934,277.567 379.349,277.622 381.635,277.749 383.286,277.749 386.969,278.384 409.448,278.384 411.861,278.638 377.825,279.527 381,279.527 410.464,280.289 378.079,280.67 381,280.67 403.479,280.797 407.67,280.797 406.701,280.876 404.977,280.886 405.91,280.896 404.358,280.937 377.952,281.813 380.873,281.94 378.206,282.956 380.365,283.21 379.308,283.314 412.607,290.27 398.907,290.576 404.368,290.576 405.765,290.703 410.337,291.084 406.908,291.338 405.227,291.562 400.05,291.592 404.188,291.621 412.877,292.1
  other v2: 381.254,239.014 418.719,239.014 379.603,239.649 382.778,239.649 417.195,239.649 420.37,239.649 378.968,241.3 383.54,241.3 416.433,241.3 421.005,241.3 379.476,242.824 383.032,242.824 416.941,242.824 420.497,242.824 381.254,243.459 418.719,243.459 381.254,287.655 418.719,287.655 379.476,288.29 383.032,288.29 416.941,288.29 420.497,288.29 378.968,289.814 383.54,289.814 416.433,289.814 421.005,289.814 379.603,291.465 382.778,291.465 417.195,291.465 420.37,291.465 381.254,292.1 418.719,292.1
NetC5_1: C5.1 R1.1 R2.1 U1.14 | length 4.6
  Top Layer w0.2: U1.14 387.752,266.908 388.087,266.573 R2.1 C5.1 R1.1
NetC9_1: C9.1 R3.1 R4.1 U1.3 | length 4.9
  Top Layer w0.18: C9.1 R3.1 R4.1 382.143,265.938 382.713,266.508 U1.3
NetC13_1: C13.1 R6.1 R7.1 U1.2 | length 5
  Top Layer w0.18: C13.1 R6.1 R7.1 381.889,267.716 382.697,266.908 U1.2
NetC17_2: C17.2 R5.2 U1.9 | length 10.9
  Top Layer w0.18: v1(385.191,263.779) 385.191,263.893 385.326,264.027 U1.9 ; v1(387.223,267.97) R5.2
  Bottom Layer w0.18: v1(385.191,263.779) 386.715,263.779 387.223,264.287 v1(387.223,267.97)
NetC51_2: C51.2 C52.2 CARD1.4 R8.2 | length 8
  Bottom Layer w0.5: v1(391.868,251.423) CARD1.4 397.221,251.46 398.018,251.46 398.653,250.825 C52.2
NetC53_1: C53.1 C54.2 V1.123 | length 7.2
  Top Layer w0.18: C53.1 396.121,247.903 396.374,247.65 398.145,247.65 400.216,249.721 V1.123
NetC55_1: C55.1 R9.1 V1.118 | length 6.8
  Top Layer w0.18: C55.1 396.24,250.952 396.24,251.721 ; R9.1 396.24,251.721 ; V1.118 396.24,251.721
NetC56_1: C56.1 V1.117 | length 3
  Top Layer w0.18: C56.1 398.773,252.476 399.129,252.121 V1.117
NetC58_2: C58.2 V1.119 | length 2.9
  Top Layer w0.18: C58.2 398.761,251.079 399.003,251.321 V1.119
NetC59_1: C59.1 V1.97 | length 4.4
  Top Layer w0.18: 400.431,260.223 400.522,260.132 401.303,260.132 V1.97
  Top Layer w0.3: C59.1 398.018,262.611 398.333,262.296 398.358,262.296 400.431,260.223
NetC61_1: C61.1 J1.5 | length 1.8
  Bottom Layer w0.5: J1.5 405.125,276.484 405.125,278.252 C61.1@405.13,278.257
NetC63_1: C63.1 J1.4 | length 4.4
  Bottom Layer w0.5: J1.4 406.4,277.495 406.414,277.509 406.414,278.034 406.629,278.249 C63.1
NetJ1_9: J1.9 R15.1 | length 1.7
  Bottom Layer w0.3: R15.1 412.377,286.012 412.377,287.721 J1.9
NetJ1_12: J1.12 R16.1 | length 1.7
  Bottom Layer w0.3: J1.12 399.148,287.716 399.148,286.017 R16.1
NetL1_2: L1.2 U1.11
NetL2_2: L2.2 U1.6
NetL3_2: L3.2 U1.20
NetLED1_2: LED1.2 R10.1 | length 1.3
  Top Layer w0.3: LED1.2 R10.1
NetR12_2: R12.2 V1.112 | length 3.3
  Top Layer w0.18: R12.2 399.034,253.873 399.467,253.44 399.664,253.44 400.346,254.121 V1.112
NetR14_1: R14.1 V1.94 | length 6
  Top Layer w0.18: 400.431,264.243 R14.1 ; V1.94 403.664,263.213
  Top Layer w0.3: R14.1 400.431,264.082 400.607,263.906 402.971,263.906 403.664,263.213
NetR17_1: R17.1 V1.73 | length 3.8
  Top Layer w0.18: V1.73 412.064,263.982 412.369,264.287 R17.1
PHY-LINK-LED: R15.2 V1.77 | length 28.2
  Top Layer w0.18: v1(409.321,283.464) 409.321,280.162 412.242,277.241 412.242,272.161 410.464,270.383 V1.77
  Bottom Layer w0.18: v1(409.321,283.464) 409.321,284.734 409.741,285.154 R15.2
PHY-RX_N: J1.2 V1.89 | length 16.6
  Top Layer w0.18: V1.89 405.664,268.398 407.856,270.59 407.856,274.543 408.685,275.372 408.835,275.372 408.94,275.267 J1.2
PHY-RX_P: J1.1 V1.90 | length 17.6
  Top Layer w0.18: V1.90 405.264,268.612 407.422,270.77 407.422,274.723 408.506,275.806 409.014,275.806 409.196,275.624 409.345,275.624 J1.1
PHY-SPD-LED: R16.2 V1.78 | length 34.8
  Top Layer w0.18: v1(408.686,282.925) 408.686,280.289 411.861,277.114 411.861,272.288 410.064,270.491 V1.78
  Bottom Layer w0.18: R16.2 408.266,285.154 408.686,284.734 v1(408.686,282.925)
PHY-TX_N: J1.6 V1.91 | length 19
  Top Layer w0.18: J1.6 404.955,273.939 405.668,274.652 405.668,274.801 405.499,274.971 403.433,274.971 402.828,274.366 402.828,268.748 404.864,266.712 V1.91
PHY-TX_P: J1.3 V1.92 | length 20
  Top Layer w0.18: V1.92 404.464,266.477 402.394,268.547 402.394,274.546 403.253,275.405 405.678,275.405 405.975,275.108 406.289,275.108 J1.3
PM_UART_RX: J2.3 V1.49 | length 38.3
  Top Layer w0.18: J2.3 394.594,241.051 394.594,242.089 394.821,242.316 398.018,242.316 400.177,240.157 413.512,240.157 413.766,240.411 413.766,242.57 415.671,244.475 415.671,247.269 414.655,248.285 414.655,253.619 415.157,254.121 V1.49
PM_UART_TX: J2.4 V1.48 | length 36
  Top Layer w0.18: J2.4 396.621,241.078 396.621,241.935 397.764,241.935 399.923,239.776 413.797,239.776 414.147,240.126 414.147,242.443 416.052,244.348 416.052,247.396 415.036,248.412 415.036,253.365 415.392,253.721 V1.48
RESET: C57.1 R11.2 S1.2 V1.99 | length 8.2
  Top Layer w0.2: S1.2@393.446,260.096 393.7,259.842 395.986,259.842 396.875,259.842 397.12,259.597 397.4,259.317 399.259,259.317 399.263,259.321 V1.99
RTC_IN: C60.1 R13.2 V1.96 Y1.2 | length 10
  Top Layer w0.18: R13.2 C60.1 396.45,264.927 397.816,264.927 399.726,263.017 402.59,263.017 402.864,262.743 V1.96
RTC_OUT: C62.1 R13.1 V1.95 Y1.1 | length 12.7
  Top Layer w0.18: R13.1 399.84,267.296 400.05,267.086 C62.1 ; 399.415,267.208 399.415,263.906 399.923,263.398 402.844,263.398 403.264,262.978 V1.95
SD_CLK: CARD1.5 V1.105 | length 17.9
  Top Layer w0.18: v1(392.684,250.317) 392.684,253.746 395.859,256.921 V1.105
  Bottom Layer w0.18: v1(392.684,250.317) 397.178,250.317 CARD1.5
SD_CMD: CARD1.3 R22.2 V1.103 | length 20
  Top Layer w0.18: v1(392.176,252.476) 392.176,253.746 396.151,257.721 V1.103
  Bottom Layer w0.18: v1(392.176,252.476) 398.399,252.476 ; CARD1.3@397.184,252.476 398.399,252.476 ; R22.2 398.78,252.12 398.57,252.33 398.545,252.33 398.399,252.476
SD_CS: CARD1.9 R25.2 V1.100 | length 30.3
  Top Layer w0.18: v1(395.859,245.872) 390.144,245.872 389.89,246.126 389.89,252.534 391.414,254.058 391.414,255.143 395.192,258.921 V1.100
  Bottom Layer w0.18: v1(395.859,245.872) 398.399,245.872 398.545,245.726 398.57,245.726 398.78,245.516 R25.2
SD_D0: CARD1.7 R21.2 V1.106 | length 22
  Top Layer w0.18: v1(393.192,248.031) 393.192,253.746 395.967,256.521 V1.106
  Bottom Layer w0.18: v1(393.192,248.031) R21.2@398.526,248.031 ; CARD1.7@397.184,248.031 R21.2@398.526,248.031 ; R21.2 398.78,247.802 398.57,248.012 398.545,248.012 R21.2@398.526,248.031
SD_D1: CARD1.8 R20.2 V1.107 | length 21.5
  Top Layer w0.18: v1(395.859,247.015) 394.208,247.015 393.7,247.523 393.7,253.746 396.075,256.121 V1.107
  Bottom Layer w0.18: v1(395.859,247.015) 398.399,247.015 ; CARD1.8@397.184,247.015 398.399,247.015 ; R20.2 398.78,246.659 398.57,246.869 398.545,246.869 398.399,247.015
SD_D2: CARD1.1 R24.2 V1.101 | length 19.2
  Top Layer w0.18: v1(391.904,254.78) 391.94,254.78 395.681,258.521 V1.101
  Bottom Layer w0.18: v1(391.904,254.78) 398.381,254.78 ; CARD1.1@397.184,254.78 398.381,254.78 ; R24.2 398.78,254.406 398.57,254.616 398.545,254.616 398.381,254.78
SD_D3: CARD1.2 R23.2 V1.102 | length 20.1
  Top Layer w0.18: v1(391.668,253.619) 391.668,253.746 396.043,258.121 V1.102
  Bottom Layer w0.18: v1(391.668,253.619) 398.399,253.619 ; CARD1.2@397.184,253.619 398.399,253.619 ; R23.2 398.78,253.263 398.57,253.473 398.545,253.473 398.399,253.619
SVREF: C66.1 C67.1 R18.2 R19.1 V1.63 V1.71 | length 16.8
  Top Layer w0.18: V1.71 412.864,260.617 412.877,260.604 ; 415.29,260.604 415.29,259.842 415.411,259.721 V1.63 419.475,259.721 C67.1
  Top Layer w0.3: 412.877,260.604 415.29,260.604 416.814,260.604 418.506,262.296 419.15,262.296 419.465,262.611 C66.1
  Top Layer w0.5: R18.2 R19.1 418.846,263.255 419.139,262.962 419.164,262.962 C66.1@419.465,262.661
USB-D_N: D3.2 USB1.A7 USB1.B7 V1.110 | length 42.9
  Top Layer w0.18: v1(389.89,284.734) 389.97,284.814 389.97,285.148 390.029,285.207 USB1.A7 ; USB1.B7 v1(390.779,288.036) ; v1(400.378,261.44) 401.373,261.44 402.905,259.908 402.905,255.218 402.608,254.921 V1.110
  Bottom Layer w0.18: v1(390.779,288.036) 389.89,287.147 v1(389.89,284.734) 389.89,284.62 390.054,284.456 390.054,274.537 398.151,266.44 398.151,263.922 400.298,261.775 400.298,261.52 v1(400.378,261.44)
USB-D_P: D4.2 USB1.A6 USB1.B6 V1.111 | length 40.4
  Top Layer w0.18: USB1.B6 390.271,287.178 390.271,286.639 390.469,286.441 390.469,285.946 USB1.A6 390.529,285.15 390.572,285.107 390.572,284.814 v1(390.652,284.734) ; v1(400.812,262.128) 400.892,262.048 401.273,262.048 403.339,259.982 403.339,254.933 402.926,254.521 V1.111
  Bottom Layer w0.18: v1(390.652,284.734) 390.652,284.62 390.488,284.456 390.488,274.717 394.843,270.362 398.585,266.619 398.585,264.101 400.479,262.208 400.732,262.208 v1(400.812,262.128)
VCC-1.2V: C5.2 C6.2 C7.1 C8.1 C30.2 C31.2 C32.2 C33.2 C34.2 C35.2 C36.2 C37.2 C38.2 C39.2 C40.2 L1.1 R1.2 V1.18 V1.19 V1.20 V1.25 V1.26 V1.38 V1.47 V1.51 V1.56 V1.58 V1.64 V1.80 V1.88 V1.108 V1.126 | length 62.2
  Top Layer w0.18: 400.114,255.721 V1.108 ; 400.134,248.521 V1.126 401.323,248.53 402.454,248.53 v1(402.463,248.539) ; V1.88 406.064,262.811 ; V1.80 409.264,262.89 ; V1.18 409.664,243.243 C37.2 410.064,243.567 V1.19 ; 410.464,243.205 V1.20 ; V1.25 412.464,243.593 412.979,243.078 413.004,243.078 412.864,243.218 V1.26 ; 415.952,256.921 V1.56 ; 416.024,257.721 V1.58 ; V1.38 v1@417.83,249.721 ; V1.47 417.83,253.321 ; V1.51 417.83,254.921 ; V1.64 V1.64@417.411,260.121
  Top Layer w0.3: C5.2 R1.2 390.931,265.723 391.081,265.573 391.081,265.548 391.287,265.342 391.287,257.528 390.299,256.54 C8.1 ; C31.2 399.663,255.27 400.114,255.721 ; C34.2 399.239,246.888 399.415,247.064 399.415,248.158 399.778,248.521 400.134,248.521 ; 406.064,262.811 406.064,263.579 406.4,263.916 C38.2 C36.2 407.949,264.834 408.099,264.684 408.099,264.659 408.559,264.199 408.559,263.398 409.067,262.89 409.264,262.89 ; v1(415.417,257.238) v1@415.498,257.238 ; 415.952,256.921 415.816,256.921 v1@415.498,257.238 ; 416.024,257.721 415.981,257.721 v1@415.498,257.238 ; V1.64@417.411,260.121 418.402,261.112 C35.2 ; v1@417.83,249.721 C40.2@419.481,249.721 ; 417.83,253.321 418.929,252.222 C32.2 419.52,249.76 C40.2@419.481,249.721 ; 417.83,254.921 417.925,255.016 C33.2 ; C40.2 C40.2@419.481,249.721
  Bottom Layer w0.18: 401.32,248.412 401.447,248.539 v1(402.463,248.539)
  other v1: 412.496,244.856 413.131,244.856 418.046,249.721 418.211,255.016 399.075,255.27 388.747,255.778 389.382,255.778 390.017,255.778 417.703,260.477 408.94,263.017
VCC-1.8V: C9.2 C10.2 C11.1 C12.1 C45.2 C46.2 C47.2 C48.2 C49.2 C50.2 L2.1 R3.2 R18.1 V1.59 V1.60 V1.61 V1.62 V1.65 V1.66 V1.67 V1.68 V1.69 V1.70 V1.72 V1.79 | length 30.7
  Top Layer w0.18: V1.79 409.664,263.398
  Top Layer w0.2: V1.72 412.464,262.731 412.623,262.89 ; V1.70 413.264,262.769 413.385,262.89 ; V1.69 413.664,262.788 413.766,262.89 ; V1.68 414.064,262.807 414.147,262.89 ; V1.67 414.464,262.826 414.528,262.89 ; V1.66 414.864,262.845 414.909,262.89 ; 415.163,262.89 415.264,262.789 V1.65 ; V1.59 418.522,258.121 v1@418.592,258.191 ; V1.60 418.541,258.521 v1@418.592,258.572 ; V1.61 418.56,258.921 418.592,258.953 ; V1.62 418.579,259.321 418.592,259.334
  Top Layer w0.3: C11.1 378.813,256.54 377.698,257.655 377.698,264.795 377.952,265.049 380.072,265.049 R3.2 ; C47.2 409.321,263.741 409.664,263.398
  other v1: 382.651,256.413 382.651,257.048 382.651,257.683 418.719,257.81 418.719,258.445 415.671,263.017 415.671,263.652 409.321,264.16
VCC-3.3V: C13.2 C14.2 C15.1 C16.1 C19.2 C20.2 C21.2 C22.2 C23.2 C24.2 C25.2 C26.2 C27.2 C28.2 C29.2 D2.2 L3.1 R5.1 R6.2 R8.1 R10.2 R11.1 R20.1 R21.1 R22.1 R23.1 R24.1 R25.1 V1.12 V1.29 V1.50 V1.57 V1.85 V1.93 V1.98 V1.104 V1.109 V1.122 V1.127 | length 86.4
  Top Layer w0.18: 400.013,250.121 V1.122 ; 400.177,259.721 V1.98 401.32,259.715 402.209,259.715 ; 400.181,247.908 400.394,248.121 V1.127 ; 400.233,255.199 400.355,255.321 V1.109 401.326,255.333 402.145,255.333 402.336,255.524 ; V1.104 402.448,257.321 402.463,257.336 ; 404.064,263.575 V1.93 404.064,260.654 404.368,260.35 406.803,260.35 407.253,260.8 407.253,261.659 V1.85 407.264,262.661 ; 407.264,245.237 V1.12 ; 414.064,245.237 V1.29 ; V1.50 417.957,254.521 ; V1.57 417.811,257.321
  Top Layer w0.3: L3.1 379.33,274.493 378.543,275.28 C19.2 377.874,276.479 377.698,276.303 377.698,268.859 377.952,268.605 380.072,268.605 R6.2 ; R10.2 v1(381.127,253.111) ; v1(389.89,273.558) 390.906,272.542 R5.1 400.47,268.82 403.059,266.231 403.059,264.58 ; C23.2 R11.1 400.056,259.842 400.177,259.721 ; C21.2 399.574,249.682 400.013,250.121 ; C29.2 399.542,245.491 399.968,245.917 399.968,247.695 400.181,247.908 ; v1(399.669,254.381) 400.233,254.945 400.233,255.199 ; C22.2 403.059,264.58 ; 402.209,259.715 402.463,259.461 402.463,257.336 402.463,255.651 402.336,255.524 ; 404.064,263.575 403.059,264.58 ; C24.2 407.058,263.248 407.058,262.867 407.264,262.661 ; 407.264,245.237 407.264,243.357 C28.2 ; v1(414.02,244.094) 414.064,244.138 414.064,245.237 ; 417.811,257.321 418.719,256.413 C25.2 ; 417.957,254.521 v1(418.859,253.619) C26.2
  Bottom Layer w0.3: v1(383.413,274.955) 388.493,274.955 v1(389.89,273.558)
  other v1: 407.264,243.936 399.929,246.485 399.669,250.063 418.743,256.437 382.143,274.955 382.778,274.955
VCC-5V: C1.1 C2.1 C3.1 C4.1 C18.1 D1.1 F1.1 U1.7 U1.8 U1.10 U1.16 U1.18 U1.19 | length 16.6
  Top Layer w0.18: C3.1 C3.1@383.794,263.017 ; U1.7@384.516,264.998 U1.7@384.521,265.003 ; 384.521,264.506 U1.7@384.521,265.003 ; U1.7 U1.7@384.521,265.003 ; U1.19 C1.1@384.526,270.03 ; C1.1@384.526,270.286 C1.1@384.526,270.037 ; C1.1@384.53,270.289 384.926,269.893 C1.1@384.926,269.637 ; 384.556,264.287 384.921,264.652 U1.8@384.921,265.003 ; U1.8@384.916,264.998 U1.8@384.921,265.003 ; U1.8 U1.8@384.921,265.003 ; U1.18 C1.1@384.926,269.637 ; C4.1 385.726,262.917 U1.10 ; U1.16 385.726,269.547 386.306,270.127 C2.1 ; C1.1@384.526,270.03 C1.1 384.436,270.127 C1.1@384.526,270.037 ; C1.1@384.526,270.03 C1.1@384.526,270.037 ; C1.1@384.526,270.037 C1.1@384.926,269.637
  Top Layer w0.5: C3.1 383.413,263.144 384.556,264.287 ; C4.1 385.515,262.636 385.845,262.966 385.845,264.433
  other v1: 384.429,262.255 384.429,262.89 386.207,269.113 386.842,269.113 387.477,269.113 385.445,279.273 385.191,279.908 385.826,279.908 385.064,280.543 385.699,280.543
VCC_VBUS: F1.2 USB1.A4 USB1.A9 USB1.B4 USB1.B9 | length 6.1
  Top Layer w0.2: USB1.A9 389.029,286.413 389.275,286.659 USB1.B4@389.275,287.182 ; v1(389.276,288.782) 389.276,288.777 v1@389.382,288.671 ; USB1.A4 391.529,286.413 391.775,286.659 USB1.B9@391.775,287.182
  Top Layer w0.3: USB1.B4@389.275,287.182 v1(389.276,288.782) ; USB1.B9 v1(391.779,288.782)
  other v1: 389.276,288.195 391.779,288.195
XTAL_IN: C64.2 V1.75 Y2.1 | length 8.3
  Top Layer w0.18: V1.75 411.264,264.325 412.624,265.685 412.624,268.75 412.159,269.215 C64.2
XTAL_OUT: C65.2 V1.74 Y2.3 | length 8.7
  Top Layer w0.18: V1.74 411.664,264.217 413.044,265.597 413.044,266.827 414.362,268.145 C65.2
pads on no net: CARD1.14 CARD1.15 J1. J1.7 J2.1 USB1. USB1.A2 USB1.A3 USB1.A5 USB1.A8 USB1.A10 USB1.A11 USB1.B2 USB1.B3 USB1.B5 USB1.B8 USB1.B10 USB1.B11 V1.1 V1.2 V1.3 V1.4 V1.5 V1.6 V1.7 V1.8 V1.9 V1.10 V1.11 V1.13 V1.14 V1.15 V1.16 V1.17 V1.21 V1.22 V1.23 V1.24 V1.27 V1.28 V1.30 V1.31 V1.32 V1.33 V1.34 V1.35 V1.36 V1.37 V1.39 V1.40 V1.41 V1.42 V1.43 V1.44 V1.45 V1.46 V1.52 V1.53 V1.54 V1.55 V1.81 V1.82 V1.83 V1.84 V1.86 V1.87 V1.113 V1.114 V1.120 V1.121 V1.124 V1.125 V1.128 Y2.2 Y2.4

## Polygon pours and split planes (outlines as drawn)
GND on Top Layer "GND_L01_P001" (solid, remove dead copper, pour order 1): 421.386,293.751 cw(c421.386,292.481) 422.656,292.481 422.656,238.633 cw(c421.386,238.633) 421.386,237.363 378.587,237.363 cw(c378.587,238.633) 377.317,238.633 377.317,292.481 cw(c378.587,292.481) 378.587,293.751
GND on Bottom Layer "GND_L02_P000" (solid, remove dead copper, pour order 0): 421.386,293.751 cw(c421.386,292.481) 422.656,292.481 422.656,238.633 cw(c421.386,238.633) 421.386,237.363 378.587,237.363 cw(c378.587,238.633) 377.317,238.633 377.317,292.481 cw(c378.587,292.481) 378.587,293.751

## Other copper
Top Layer:
  rectangle net VCC-1.2V: 388.366,255.524 390.271,257.175
  rectangle net VCC-3.3V: 378.206,273.177 383.667,275.971
  rectangle net VCC-1.2V: 385.826,256.159 390.779,259.334
  rectangle net VCC-1.8V: 378.333,256.032 383.032,259.461
  rectangle net VCC-5V: 387.477,269.113 388.747,280.162
  rectangle net VCC-5V: 384.683,278.892 389.382,280.924
  rectangle net NetL3_2: 378.206,269.24 381.762,271.526
  rectangle net NetL2_2: 378.206,263.652 382.143,264.287
  rectangle net NetL2_2: 378.206,261.874 381.762,264.287
  rectangle net NetL1_2: 386.461,262.509 390.652,264.922
  rectangle net NetL3_2: 383.286,267.716 384.175,268.605
  region net NetL3_2: 383.286,267.716 384.175,268.605 381.637,271.143 380.748,270.254
  rectangle net VCC-5V: 383.286,262.001 385.953,263.271
  rectangle net NetL1_2: 386.426,261.493 387.477,265.811
  region net NetL2_2: 383.159,265.43 383.159,264.541 384.163,264.541 384.163,265.43
  region net NetL2_2: 383.921,264.668 383.203,265.386 380.934,263.118 381.652,262.399
  rectangle net VCC-5V: 384.433,268.777 388.747,270.764
  rectangle net VCC-1.2V: 409.194,242.951 413.512,245.237
  rectangle net VCC-1.8V: 418.338,257.429 420.116,258.699
  rectangle net VCC-1.8V: 418.338,257.429 418.973,259.461
  rectangle net VCC-1.8V: 415.29,262.636 416.643,266.319
  rectangle net VCC-1.8V: 412.369,262.636 416.643,263.398
Bottom Layer:
  region net VCC-1.8V: 403.479,257.683 403.479,258.699 382.143,258.699 382.143,257.683
  region net VCC-1.8V: 403.964,257.683 403.964,264.83 402.694,264.83 402.694,257.683
  rectangle net VCC-1.8V: 382.143,256.032 383.159,258.191
  rectangle net VCC-1.8V: 403.369,263.56 410.21,264.83
  region net VCC-3.3V: 402.971,242.479 402.971,243.876 392.795,243.876 392.795,242.479
  rectangle net VCC-3.3V: 392.811,243.332 394.208,246.634
  rectangle net VCC-3.3V: 380.746,245.618 394.208,246.888
  region net VCC-3.3V: 381.889,245.618 381.889,275.463 380.238,275.463 380.238,245.618
  rectangle net VCC-3.3V: 380.365,274.447 383.794,275.463
  rectangle net VCC-1.2V: 408.432,261.62 409.321,263.398
  rectangle net VCC-1.2V: 408.686,261.62 418.211,262.509
  rectangle net VCC-1.2V: 417.703,249.174 418.465,252.984
  region net VCC-1.2V: 401.604,244.856 401.604,256.286 400.558,256.286 400.558,244.856
  rectangle net VCC-1.2V: 398.653,254.889 401.574,256.286
  rectangle net VCC-1.2V: 398.653,254.889 399.415,256.032
  rectangle net VCC-1.2V: 388.493,255.27 401.193,256.286
  rectangle net VCC-3.3V: 399.288,243.459 400.304,254.762
  region net VCC-5V: 388.874,268.478 388.874,269.748 385.699,269.748 385.699,268.478
  rectangle net VCC-5V: 387.731,261.874 388.874,269.748
  rectangle net VCC-5V: 383.921,261.874 388.747,263.271
  rectangle net VCC-5V: 382.397,278.765 386.334,280.924
  region net VCC-5V: 389.319,285.814 388.092,287.04 382.187,281.134 383.413,279.908
  rectangle net VCC_VBUS: 391.251,287.782 392.267,289.433
  rectangle net VCC_VBUS: 388.747,287.782 389.763,289.433
  rectangle net VCC_VBUS: 387.477,288.544 392.303,290.068
  region net VCC-3.3V: 414.401,244.348 399.288,244.348 399.288,243.459 414.401,243.459
  region net VCC-3.3V: 419.367,254 418.478,254 418.478,253.238 419.367,253.238
  region net VCC-3.3V: 419.251,256.818 418.362,256.818 418.362,256.056 419.251,256.056
  region net VCC-3.3V: 414.395,243.465 419.602,248.672 418.973,249.301 413.766,244.094
  rectangle net VCC-3.3V: 418.719,248.666 419.608,256.818
  region net VCC-1.2V: 413.766,244.475 418.465,249.174 417.703,249.936 413.004,245.237
  rectangle net VCC-1.2V: 400.558,244.475 413.766,245.491
  rectangle net VCC-1.2V: 417.538,249.301 418.338,250.102
  rectangle net VCC-1.2V: 417.703,254.635 418.592,255.397
  rectangle net VCC-1.2V: 415.036,256.921 417.703,257.556
  rectangle net VCC-1.2V: 417.322,249.301 418.211,262.382
  rectangle net VCC-1.8V: 418.338,257.429 419.1,263.906
  rectangle net VCC-1.8V: 409.448,262.636 419.1,263.906

## Silkscreen, mask and mechanical layers (free items; w line width, h text height)
Top Overlay:
  region: 388.112,245.11 388.112,242.77 389.255,242.77 389.255,245.11
  region: 397.479,245.11 397.479,242.77 398.622,242.77 398.622,245.11
  text "NC" at 389.161,245.159 h1.5 r270
  text "GN" at 391.161,245.159 h1.5 r270
  text "Rx1" at 393.161,245.159 h1.5 r270
  text "Tx1" at 395.161,245.159 h1.5 r270
Bottom Overlay:
  region: 250 vertices and 4 holes, not listed, extent 381.307,261.754 394.312,277.4
  text "GIGA NODES" at 407.501,263.964 h3
  text "20220721 V1.0" at 407.501,261.304 h1.5
Mechanical 1:
  lines w0.254: 377.53,234.315 377.53,234.823 ; 379.054,234.061 377.53,234.569 ; 379.054,235.077 377.53,234.569 ; 392.176,234.569 377.53,234.569 ; 408.224,234.569 422.869,234.569 ; 421.345,234.061 422.869,234.569 ; 421.345,235.077 422.869,234.569 ; 422.869,234.315 422.869,234.823 ; 426.72,239.037 427.228,237.513 ; 426.72,292.377 427.228,293.901 ; 426.974,237.513 427.482,237.513 ; 426.974,293.901 427.482,293.901 ; 427.228,257.683 427.228,237.513 ; 427.228,273.731 427.228,293.901 ; 427.736,239.037 427.228,237.513 ; 427.736,292.377 427.228,293.901 ; 377.317,238.633 ccw(c378.587,238.633) 378.587,237.363 421.386,237.363 ccw(c421.386,238.633) 422.656,238.633 422.656,292.481 ccw(c421.386,292.481) 421.386,293.751 393.954,293.751 378.587,293.751 ccw(c378.587,292.481) 377.317,292.481 377.317,238.633
  text "56.388 (mm)" at 428.142,257.937 h1.52 r90
  text "45.339 (mm)" at 392.43,233.655 h1.52